# EAGLE board Deska_Transf (EAGLE 5.06), part 1 of 2
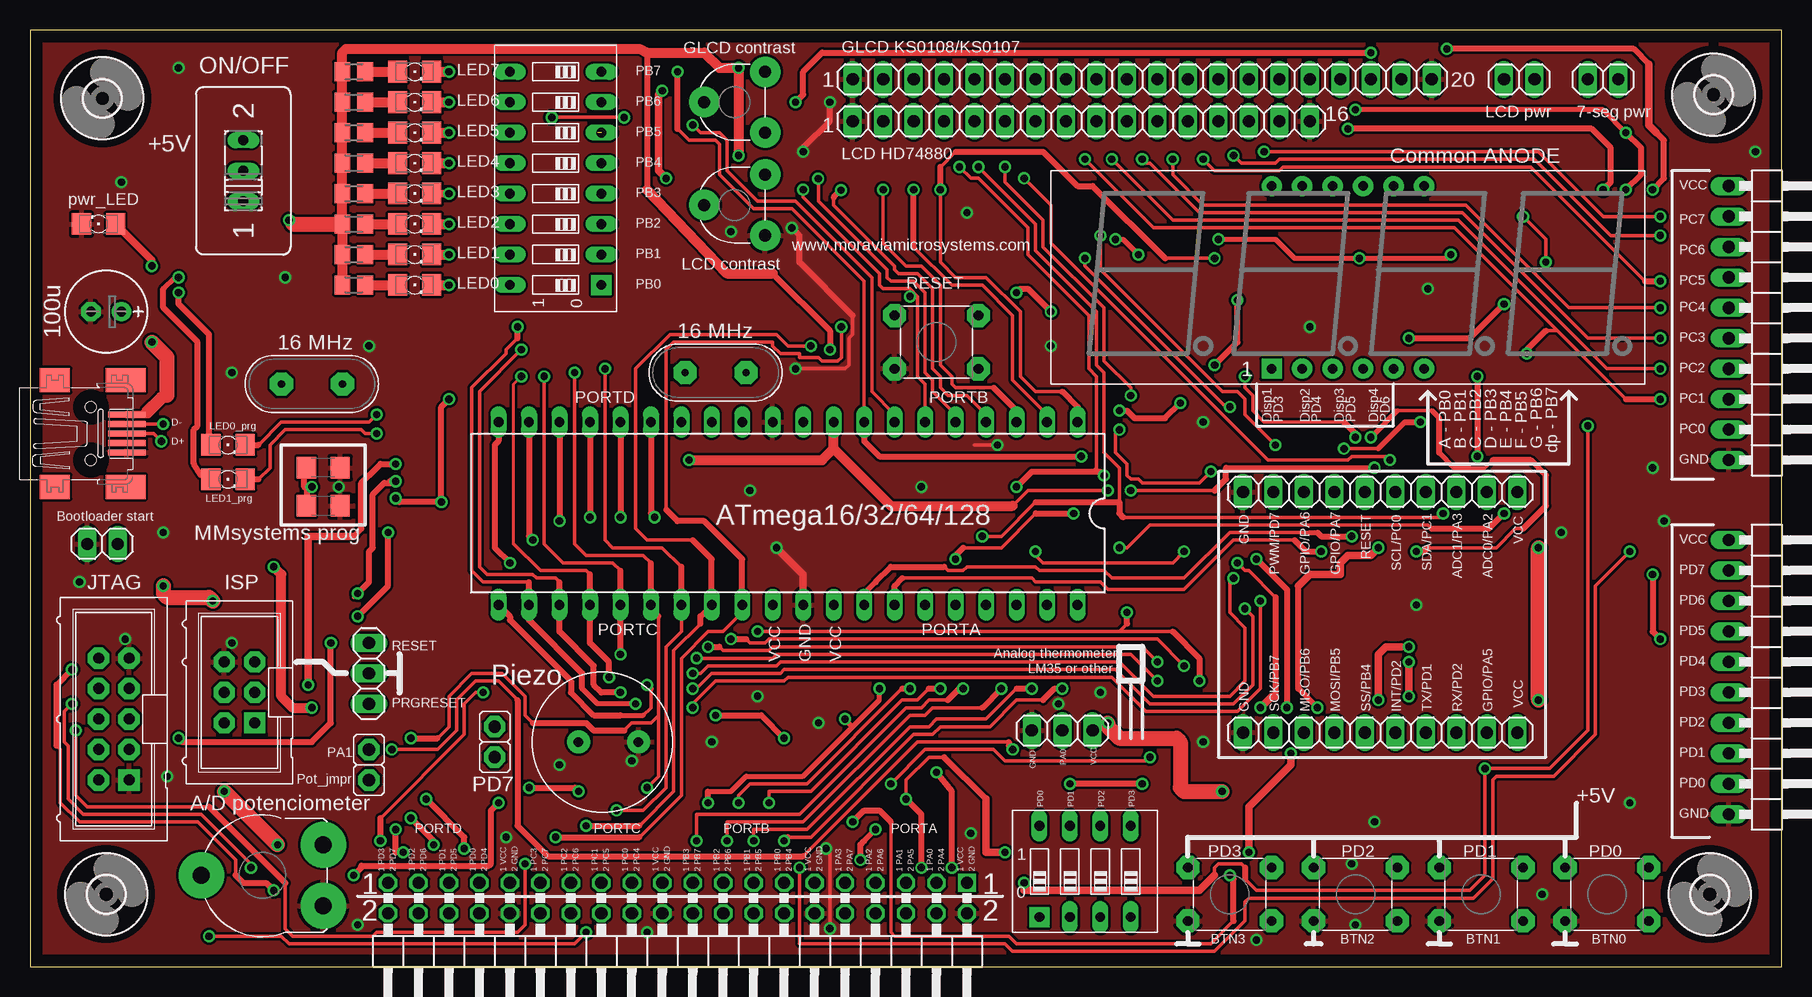
[diagram p0: board, top side]
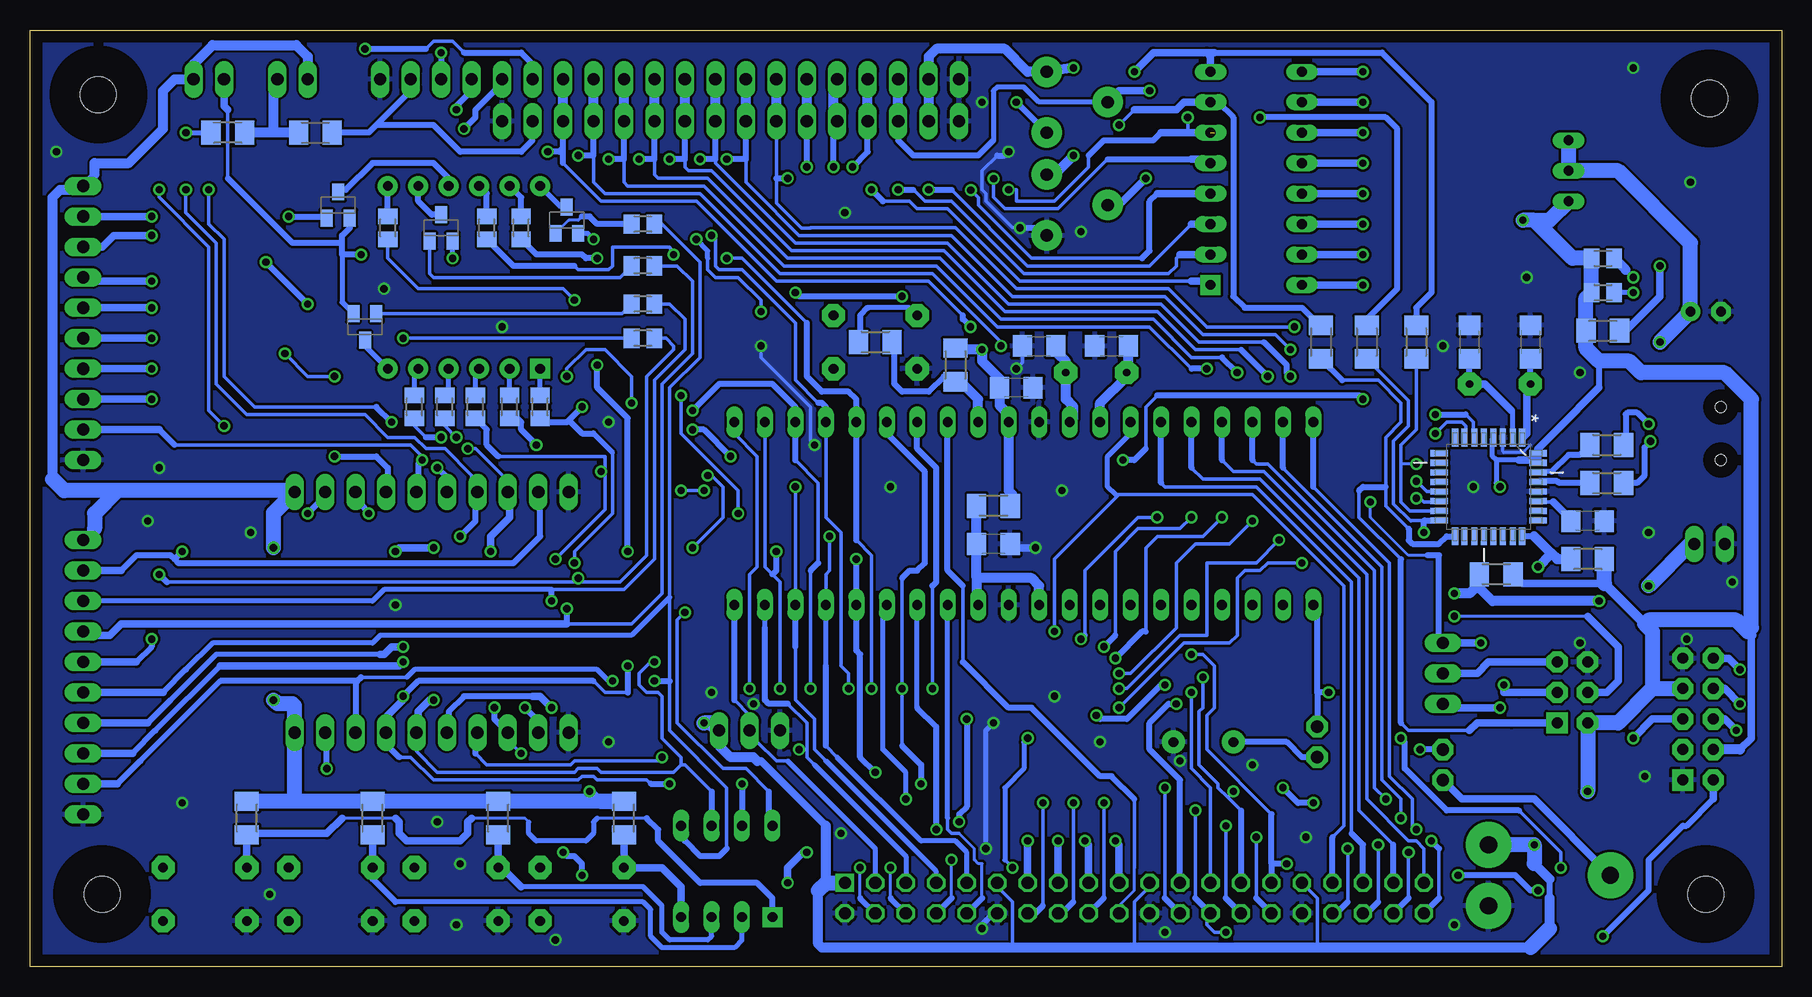
[diagram p1: board, bottom side, seen from below]

Size 146.03 x 78.09 mm. Coordinates in mm from the lower left corner, seen from the top.
Outline: 0,0 146.03,0 146.03,78.09 0,78.09 0,0
Copper layers (1*16): Top 0.035mm / dielectric 1.5mm / Bottom 0.035mm
Design rules "default *": minimum track width 10mil, minimum drill 24mil, track to track 8mil, track to pad 8mil, pad to pad 8mil, via to via 8mil, smd to smd 8mil, copper to edge 40mil, drill to drill 8mil, minimum pad ring 10mil, minimum via ring 8mil, stop-mask expansion 4mil, vias tented up to drill 0mil, thermal gap 10mil

## Footprints (pad centres in the part's own frame; a part is rotated, then mirrored left to right if it is on the bottom)
M1206 = smd 1.6 x 2: 1 -1.4,0; 2 1.4,0
P-B1720 = drill 0.813 pad 1.93 octagon: 1 -3.493,-2.223; 2 -3.493,2.223; 3 3.493,-2.223; 4 3.493,2.223
C1206 = smd 1.6 x 1.8: 1 -1.4,0; 2 1.4,0
E2,5-7 = drill 0.813 pad 1.6 round: + -1.27,0 | drill 0.813 pad 1.6 octagon: - 1.27,0
MLW10G = drill 0.914 pad 1.778 square: 1 -5.08,-1.27 | drill 0.914 pad 1.778 octagon: 2 -5.08,1.27; 3 -2.54,-1.27; 4 -2.54,1.27; 5 0,-1.27; 6 0,1.27; 7 2.54,-1.27; 8 2.54,1.27; 9 5.08,-1.27; 10 5.08,1.27
HDM51X = drill 0.813 pad 1.676 square: 1 0,0 | drill 0.813 pad 1.676 round: 2 2.54,0; 3 5.08,0; 4 7.62,0; 5 10.16,0; 6 12.7,0; 7 12.7,15.24; 8 10.16,15.24; 9 7.62,15.24; 10 5.08,15.24; 11 2.54,15.24; 12 0,15.24
DIL40 = drill 0.813 long: 1 -24.13,-7.62; 2 -21.59,-7.62; 3 -19.05,-7.62; 4 -16.51,-7.62; 5 -13.97,-7.62; 6 -11.43,-7.62; 7 -8.89,-7.62; 8 -6.35,-7.62; 9 -3.81,-7.62; 10 -1.27,-7.62; 11 1.27,-7.62; 12 3.81,-7.62; 13 6.35,-7.62; 14 8.89,-7.62; 15 11.43,-7.62; 16 13.97,-7.62; 17 16.51,-7.62; 18 19.05,-7.62; 19 21.59,-7.62; 20 24.13,-7.62; 21 24.13,7.62; 22 21.59,7.62; 23 19.05,7.62; 24 16.51,7.62; 25 13.97,7.62; 26 11.43,7.62; 27 8.89,7.62; 28 6.35,7.62; 29 3.81,7.62; 30 1.27,7.62; 31 -1.27,7.62; 32 -3.81,7.62; 33 -6.35,7.62; 34 -8.89,7.62; 35 -11.43,7.62; 36 -13.97,7.62; 37 -16.51,7.62; 38 -19.05,7.62; 39 -21.59,7.62; 40 -24.13,7.62
MLW06G = drill 0.914 pad 1.778 square: 1 -2.54,-1.27 | drill 0.914 pad 1.778 octagon: 2 -2.54,1.27; 3 0,-1.27; 4 0,1.27; 5 2.54,-1.27; 6 2.54,1.27
1X03 = drill 1.016 long: 1 -2.54,0; 2 0,0; 3 2.54,0
1X02 = drill 1.016 long: 1 -1.27,0; 2 1.27,0
1X16 = drill 1.016 long: 1 -19.05,0; 2 -16.51,0; 3 -13.97,0; 4 -11.43,0; 5 -8.89,0; 6 -6.35,0; 7 -3.81,0; 8 -1.27,0; 9 1.27,0; 10 3.81,0; 11 6.35,0; 12 8.89,0; 13 11.43,0; 14 13.97,0; 15 16.51,0; 16 19.05,0
1X10/90 = drill 1.016 long: 1 -11.43,-3.81; 2 -8.89,-3.81; 3 -6.35,-3.81; 4 -3.81,-3.81; 5 -1.27,-3.81; 6 1.27,-3.81; 7 3.81,-3.81; 8 6.35,-3.81; 9 8.89,-3.81; 10 11.43,-3.81
1X20 = drill 1.016 long: 1 -24.13,0; 2 -21.59,0; 3 -19.05,0; 4 -16.51,0; 5 -13.97,0; 6 -11.43,0; 7 -8.89,0; 8 -6.35,0; 9 -3.81,0; 10 -1.27,0; 11 1.27,0; 12 3.81,0; 13 6.35,0; 14 8.89,0; 15 11.43,0; 16 13.97,0; 17 16.51,0; 18 19.05,0; 19 21.59,0; 20 24.13,0
1X10 = drill 1.016 long: 1 -11.43,0; 2 -8.89,0; 3 -6.35,0; 4 -3.81,0; 5 -1.27,0; 6 1.27,0; 7 3.81,0; 8 6.35,0; 9 8.89,0; 10 11.43,0
2X20/90 = drill 1.016 square: 1 -24.13,-6.35 | drill 1.016 octagon: 2 -24.13,-3.81; 3 -21.59,-6.35; 4 -21.59,-3.81; 5 -19.05,-6.35; 6 -19.05,-3.81; 7 -16.51,-6.35; 8 -16.51,-3.81; 9 -13.97,-6.35; 10 -13.97,-3.81; 11 -11.43,-6.35; 12 -11.43,-3.81; 13 -8.89,-6.35; 14 -8.89,-3.81; 15 -6.35,-6.35; 16 -6.35,-3.81; 17 -3.81,-6.35; 18 -3.81,-3.81; 19 -1.27,-6.35; 20 -1.27,-3.81; 21 1.27,-6.35; 22 1.27,-3.81; 23 3.81,-6.35; 24 3.81,-3.81; 25 6.35,-6.35; 26 6.35,-3.81; 27 8.89,-6.35; 28 8.89,-3.81; 29 11.43,-6.35; 30 11.43,-3.81; 31 13.97,-6.35; 32 13.97,-3.81; 33 16.51,-6.35; 34 16.51,-3.81; 35 19.05,-6.35; 36 19.05,-3.81; 37 21.59,-6.35; 38 21.59,-3.81; 39 24.13,-6.35; 40 24.13,-3.81
S1G2_JUM = drill 1.016 pad 1.778 octagon: 1 -1.27,0; 2 1.27,0
KXG0905C = drill 0.8 pad 1.93 round: 1 0,0; 2 5,0
1206 = smd 1.6 x 1.803: A -1.422,0; C 1.422,0
HC-49U = drill 0.61 pad 1.93 octagon: 1 -2.54,0; 2 2.54,0
SOT23-BEC = smd 1 x 1.4: B -0.95,-1.1; C 0,1.1; E 0.95,-1.1
PT6V = drill 1.016 pad 2.54 round: 1 0,0; 2 5.08,0; 3 2.54,5.08
M0805 = smd 1.3 x 1.6: 1 -0.95,0; 2 0.95,0
PT10V = drill 1.422 pad 3.81 round: 1 0,0; 2 5.08,0; 3 2.54,10.16
M251 = drill 0.813 long: 1 -2.54,0; 2 0,0; 3 2.54,0
DIP-8X = drill 0.813 pad 1.676 square: 1 -8.89,-3.81 | drill 0.813 pad 1.27 long: 2 -6.35,-3.81; 3 -3.81,-3.81; 4 -1.27,-3.81; 5 1.27,-3.81; 6 3.81,-3.81; 7 6.35,-3.81; 8 8.89,-3.81; 9 8.89,3.81; 10 6.35,3.81; 11 3.81,3.81; 12 1.27,3.81; 13 -1.27,3.81; 14 -3.81,3.81; 15 -6.35,3.81; 16 -8.89,3.81
DIP-4X = drill 0.813 pad 1.676 square: 1 -3.81,-3.81 | drill 0.813 pad 1.27 long: 2 -1.27,-3.81; 3 1.27,-3.81; 4 3.81,-3.81; 5 3.81,3.81; 6 1.27,3.81; 7 -1.27,3.81; 8 -3.81,3.81
QFP80P900X900X120-32N = smd 1.473 x 0.508: 1 -4.115,2.794; 2 -4.115,2.007; 3 -4.115,1.194; 4 -4.115,0.406; 5 -4.115,-0.406; 6 -4.115,-1.194; 7 -4.115,-2.007; 8 -4.115,-2.794; 17 4.115,-2.794; 18 4.115,-2.007; 19 4.115,-1.194; 20 4.115,-0.406; 21 4.115,0.406; 22 4.115,1.194; 23 4.115,2.007; 24 4.115,2.794 | smd 0.508 x 1.473: 9 -2.794,-4.115; 10 -2.007,-4.115; 11 -1.194,-4.115; 12 -0.406,-4.115; 13 0.406,-4.115; 14 1.194,-4.115; 15 2.007,-4.115; 16 2.794,-4.115; 25 2.794,4.115; 26 2.007,4.115; 27 1.194,4.115; 28 0.406,4.115; 29 -0.406,4.115; 30 -1.194,4.115; 31 -2.007,4.115; 32 -2.794,4.115
3,0 = hole 3: 0,0
32005-201 = smd 3.1 x 0.5: 1 3,1.6; 2 3,0.8; 3 3,0; 4 3,-0.8; 5 3,-1.6 | smd 2.5 x 2: M1 -3,-4.45; M2 -3,4.45 | smd 3.3 x 2: M3 2.9,4.45; M4 2.9,-4.45 | hole 0.9: 0,2.2; 0,-2.2

## Placement (x,y rotation side)
10  100  [M1206]  30.48,52.07 90 bottom
11  100  [M1206]  34.61,52.07 90 bottom
12  100  [M1206]  38.42,52.07 90 bottom
BTN4  P-B1720  [P-B1720]  131.44,6.03 0 top
BTN5  P-B1720  [P-B1720]  120.97,6.03 0 top
BTN6  P-B1720  [P-B1720]  110.49,6.03 0 top
BTN7  P-B1720  [P-B1720]  100.01,6.03 0 top
C1  27p  [C1206]  55.88,51.75 0 bottom
C2  27p  [C1206]  61.91,51.75 0 bottom
C3  100n  [C1206]  63.82,48.26 180 bottom
C4  100n  [C1206]  65.72,35.24 180 bottom
C7  100n  [C1206]  24.45,38.42 180 top
C22  100u  [E2,5-7]  6.35,54.61 180 top
C23  27p  [C1206]  20.95,52.07 270 bottom
C24  27p  [C1206]  26.04,52.07 270 bottom
C25  1u  [C1206]  16.19,37.15 180 bottom
C26  100n  [C1206]  24.45,41.59 180 top
CON1  MLW10  [MLW10G]  6.99,20.64 90 top
H3  [HDM51X]  103.5,49.85 0 top
IC1  MEGA16-P  [DIL40]  63.18,37.78 180 top
JP1  MLW06  [MLW06G]  17.46,22.86 90 top
JP2  [1X03]  86.04,19.68 0 top
JP3  [1X02]  131.13,73.98 180 top
JP4  [1X16]  87.63,70.48 0 top
JP5  [1X10/90]  145.41,53.66 270 top
JP6  [1X20]  92.71,73.98 0 top
JP7  [1X10]  112.55,19.52 0 top
JP8  [1X03]  28.26,24.45 90 top
JP9  [1X02]  124.14,73.98 180 top
JP10  [1X10]  112.55,39.58 0 top
JP11  [1X10/90]  145.41,24.13 270 top
JP13  [2X20/90]  53.98,0.64 180 top
JP15  [1X02]  6.03,35.24 180 top
JUM1  S1G2_JUMP  [S1G2_JUM]  28.26,16.83 90 top
JUM2  S1G2_JUMP  [S1G2_JUM]  38.73,18.73 270 top
KXG0905C1  KXG0905C  [KXG0905C]  45.72,18.73 0 top
LED8  [1206]  16.51,43.5 0 top
LED9  [1206]  16.51,40.64 0 top
LED10  [1206]  32.07,56.83 0 top
LED11  [1206]  32.07,59.37 0 top
LED12  [1206]  32.07,61.91 0 top
LED13  [1206]  32.07,64.45 0 top
LED14  [1206]  32.07,66.99 0 top
LED15  [1206]  32.07,69.53 0 top
LED16  [1206]  32.07,72.07 0 top
LED17  [1206]  32.07,74.61 0 top
LEDVCCUSB1  [1206]  5.71,61.91 180 top
Q1  Q_HC-49U  [HC-49U]  57.15,49.53 0 top
Q2  BC857CSMD  [SOT23-BEC]  101.28,62.23 0 bottom
Q3  Q_HC-49U  [HC-49U]  23.5,48.58 0 top
Q5  BC857CSMD  [SOT23-BEC]  120.33,63.5 0 bottom
Q7  BC857CSMD  [SOT23-BEC]  111.76,61.59 0 bottom
Q8  BC857CSMD  [SOT23-BEC]  118.11,53.34 180 bottom
R1  4k7  [M1206]  23.81,32.7 0 bottom
R2  10k  [PT6V]  61.28,69.53 90 top
R3  10k  [M1206]  68.9,50.16 90 bottom
R4  1500  [M0805]  26.99,74.61 180 top
R5  1500  [M0805]  26.99,72.07 180 top
R6  10k  [PT10V]  24.45,5.08 90 top
R7  1500  [M0805]  105.09,61.59 270 bottom
R8  1500  [M0805]  116.2,61.59 270 bottom
R9  1500  [M0805]  111.44,46.67 270 bottom
R10  1500  [M0805]  106.05,46.67 270 bottom
R11  1500  [M0805]  103.5,46.67 270 bottom
R12  1500  [M0805]  107.95,61.59 270 bottom
R13  1500  [M0805]  113.98,46.67 270 bottom
R14  1500  [M0805]  26.99,69.53 180 top
R15  1500  [M0805]  26.99,66.99 180 top
R16  1500  [M0805]  26.99,64.45 180 top
R17  1500  [M0805]  26.99,61.91 180 top
R18  23R  [M1206]  14.61,43.5 180 bottom
R19  23R  [M1206]  14.61,40.32 180 bottom
R20  330R  [M1206]  75.56,52.07 180 bottom
R21  1500  [M0805]  108.9,46.67 270 bottom
R22  47k  [M0805]  94.93,58.42 0 bottom
R23  1500  [M0805]  26.99,59.37 180 top
R24  47k  [M0805]  94.93,55.24 0 bottom
R25  47k  [M0805]  94.93,52.39 0 bottom
R26  10uH  [M1206]  65.72,38.42 0 bottom
R27  10k  [M1206]  129.54,69.53 0 bottom
R28  10k  [M1206]  16.19,33.97 0 bottom
R29  1500  [M0805]  14.92,56.2 180 bottom
R30  1500  [M0805]  14.92,59.05 180 bottom
R31  2k  [M1206]  14.92,53.02 180 bottom
R32  1500  [M0805]  26.99,56.83 180 top
R33  4k7  [M1206]  127.95,12.38 270 bottom
R34  4k7  [M1206]  117.47,12.38 270 bottom
R35  4k7  [M1206]  107,12.38 270 bottom
R36  4k7  [M1206]  96.52,12.38 270 bottom
R37  330  [M1206]  122.24,69.53 180 bottom
R38  47k  [M0805]  94.93,61.91 0 bottom
R39  10k  [PT6V]  61.28,60.96 90 top
S2  [M251]  17.78,66.36 90 top
SW1  DIP-8X_DIP  [DIP-8X]  43.81,65.72 90 top
SW2  P-B1720  [P-B1720]  75.56,52.07 0 top
SW5  DIP-4X_DIP  [DIP-4X]  87.95,7.94 0 top
U1  AT90USB162-16AU  [QFP80P900X900X120-32N]  24.45,40.01 270 bottom
U$1  [3,0]  140.02,6.03 0 top
U$2  [3,0]  140.34,72.71 0 top
U$3  [3,0]  6.03,72.39 0 top
U$4  [3,0]  6.35,6.03 0 top
X3  MINI-USB-32005-201  [32005-201]  5.08,44.45 0 top

## Library data of the parts
10-12 C1-C4 C7 C22-C26 R1 R3-R5 R7-R38 = resistor
BTN4-BTN7 SW1 SW2 SW5 = #PaJa_prepinace
CON1 JP1 JUM1 JUM2 = #PaJa_konektory
H3 R2 R6 R39 = #_GM99
IC1 = avr-7
JP2 JP4 JP6 JP8 JP9 = pinhead
JP3 JP7 JP10 JP13 JP15 = acon-tyco (19)
JP5 JP11 = acon-tyco (18)
KXG0905C1 = piezo2
LED8-LED17 LEDVCCUSB1 = led
Q1 Q3 = #PaJa_22
Q2 Q5 Q7 Q8 = transistor-pnp
S2 = switch
U1 = at90,; MPN: AT90USB162-16AU; OC_FARNELL: 1455073; OC_NEWARK: 58M3868; PACKAGE: TQFP-32; SUPPLIER: Atmel
U$1-U$4 = holes
X3 = con-cypressindustries

## Nets
A: JP4.15 JP6.19 R37.1
GND: BTN4.1 BTN5.1 BTN6.1 BTN7.1 C1.1 C2.1 C3.1 C4.1 C7.1 C22.- C23.1 C24.1 C25.1 C26.1 CON1.1 CON1.9 IC1.11 IC1.31 JP1.6 JP2.1 JP4.1 JP4.16 JP5.10 JP6.1 JP6.20 JP7.1 JP10.1 JP11.10 JP13.2 JP13.12 JP13.22 JP13.32 JP15.2 KXG0905C1.2 LEDVCCUSB1.C R6.1 R39.1 SW2.1 U1.3 U1.28 X3.5
MISO: 12.1 JP1.1 U1.17
MOSI: 11.1 JP1.4 U1.16
N2: JP1.5 JP8.2
N$1: C25.2 U1.27
N$2: C1.2 IC1.13 Q1.1
N$3: C2.2 IC1.12 Q1.2
N$4: C4.2 IC1.30 IC1.32 R26.1
N$5: JP3.2 Q2.E Q5.E Q7.E Q8.E
N$6: JP15.1 R1.1 U1.13
N$7: C22.+ S2.2 S2.3 X3.1
N$8: H3.11 R7.1
N$9: H3.7 R8.1
N$10: H3.12 Q2.C
N$11: LED17.C SW1.9
N$12: H3.9 Q5.C
N$13: H3.8 Q7.C
N$14: H3.10 R12.1
N$15: LED16.C SW1.10
N$16: LED15.C SW1.11
N$17: LED14.C SW1.12
N$18: LED12.C SW1.14
N$19: LED11.C SW1.15
N$20: LED10.C SW1.16
N$21: LED13.C SW1.13
N$22: LED17.A R4.1
N$23: LED16.A R5.1
N$24: LED15.A R14.1
N$25: LED14.A R15.1
N$26: LED13.A R16.1
N$27: LED12.A R17.1
N$28: LED11.A R23.1
N$29: LED10.A R32.1
N$30: JUM1.1 R6.3
N$31: H3.5 R13.1
N$32: H3.3 R21.1
N$33: JP9.1 R27.2 R37.2
N$34: H3.4 R9.1
N$35: H3.2 R10.1
N$36: H3.1 R11.1
N$37: H3.6 Q8.C
N$38: Q2.B R38.1
N$39: Q5.B R25.1
N$40: Q7.B R22.1
N$41: Q8.B R24.1
N$42: JUM2.2 KXG0905C1.1
N$57: R20.2 SW2.2
N$58: BTN4.2 R33.2 SW5.1
N$59: BTN5.2 R34.2 SW5.2
N$60: BTN6.2 R35.2 SW5.3
N$61: BTN7.2 R36.2 SW5.4
N$62: R18.2 U1.30
N$64: R18.1 X3.2
N$65: R19.1 X3.3
N$66: R19.2 U1.29
N$68: LED8.C U1.6
N$69: LED8.A R29.1
N$70: LED9.A R30.1
N$71: LED9.C U1.7
N$76: LEDVCCUSB1.A R31.1
NTRST: CON1.3
PA0: IC1.40 JP2.2 JP13.3
PA1: IC1.39 JP13.5 JUM1.2
PA2: IC1.38 JP4.4 JP6.4 JP10.9 JP13.7
PA3: IC1.37 JP4.5 JP6.5 JP10.8 JP13.9
PA4: IC1.36 JP4.6 JP6.6 JP13.4
PA5: IC1.35 JP6.15 JP7.9 JP13.6
PA6: IC1.34 JP6.16 JP10.3 JP13.8
PA7: IC1.33 JP6.17 JP10.4 JP13.10 R27.1
PB0: IC1.1 JP13.13 R7.2 SW1.1
PB1: IC1.2 JP13.15 R8.2 SW1.2
PB2: IC1.3 JP13.17 R9.2 SW1.3
PB3: IC1.4 JP13.19 R10.2 SW1.4
PB4: IC1.5 JP7.5 JP13.14 R11.2 SW1.5
PB5: 11.2 IC1.6 JP7.4 JP13.16 R12.2 SW1.6
PB6: 12.2 IC1.7 JP7.3 JP13.18 R13.2 SW1.7
PB7: 10.2 IC1.8 JP7.2 JP13.20 R21.2 SW1.8
PC0: IC1.22 JP4.7 JP5.9 JP6.7 JP10.6 JP13.23
PC1: IC1.23 JP4.8 JP5.8 JP6.8 JP10.7 JP13.25
PC2: CON1.10 IC1.24 JP4.9 JP5.7 JP6.9 JP13.27
PC3: CON1.6 IC1.25 JP4.10 JP5.6 JP6.10 JP13.29
PC4: CON1.8 IC1.26 JP4.11 JP5.5 JP6.11 JP13.24
PC5: CON1.2 IC1.27 JP4.12 JP5.4 JP6.12 JP13.26
PC6: IC1.28 JP4.13 JP5.3 JP6.13 JP13.28
PC7: IC1.29 JP4.14 JP5.2 JP6.14 JP13.30
PD0: IC1.14 JP7.8 JP11.9 JP13.33 SW5.8
PD1: IC1.15 JP7.7 JP11.8 JP13.35 SW5.7
PD2: IC1.16 JP7.6 JP11.7 JP13.37 SW5.6
PD3: IC1.17 JP11.6 JP13.39 R38.2 SW5.5
PD4: IC1.18 JP11.5 JP13.34 R25.2
PD5: IC1.19 JP11.4 JP13.36 R22.2
PD6: IC1.20 JP11.3 JP13.38 R24.2
PD7: IC1.21 JP10.2 JP11.2 JP13.40 JUM2.1
RESET: CON1.5 IC1.9 JP8.3 JP10.5 R3.1 R20.1 U1.14
RESETPRG: JP8.1 R28.1 U1.24
SCK: 10.1 JP1.3 U1.15
V0: JP4.3 JP6.3 R2.3 R39.3
VCC: C3.2 C7.2 C26.2 CON1.4 CON1.7 IC1.10 JP1.2 JP2.3 JP3.1 JP4.2 JP5.1 JP6.2 JP7.10 JP9.2 JP10.10 JP11.1 JP13.1 JP13.11 JP13.21 JP13.31 R1.2 R2.2 R3.2 R4.2 R5.2 R6.2 R14.2 R15.2 R16.2 R17.2 R23.2 R26.2 R28.2 R29.2 R30.2 R31.2 R32.2 R33.1 R34.1 R35.1 R36.1 R39.2 S2.1 U1.4 U1.31 U1.32
VOUT: JP6.18 R2.1
XTAL1: C23.2 Q3.1 U1.1
XTAL2: C24.2 Q3.2 U1.2